# Altium PCB PCB.PcbDoc
Units mm, origin at the board's own origin, x right, y up, seen from the top; angles counter-clockwise.
Board outline 35.5 x 41.5 mm, 4 copper layers (Top Layer (PWR), Int1 (GND), Int2 (PWR), Bottom Layer (GND)), stack 1.439 mm thick; 6 components, 2 nets, 24 pads, 58 vias.
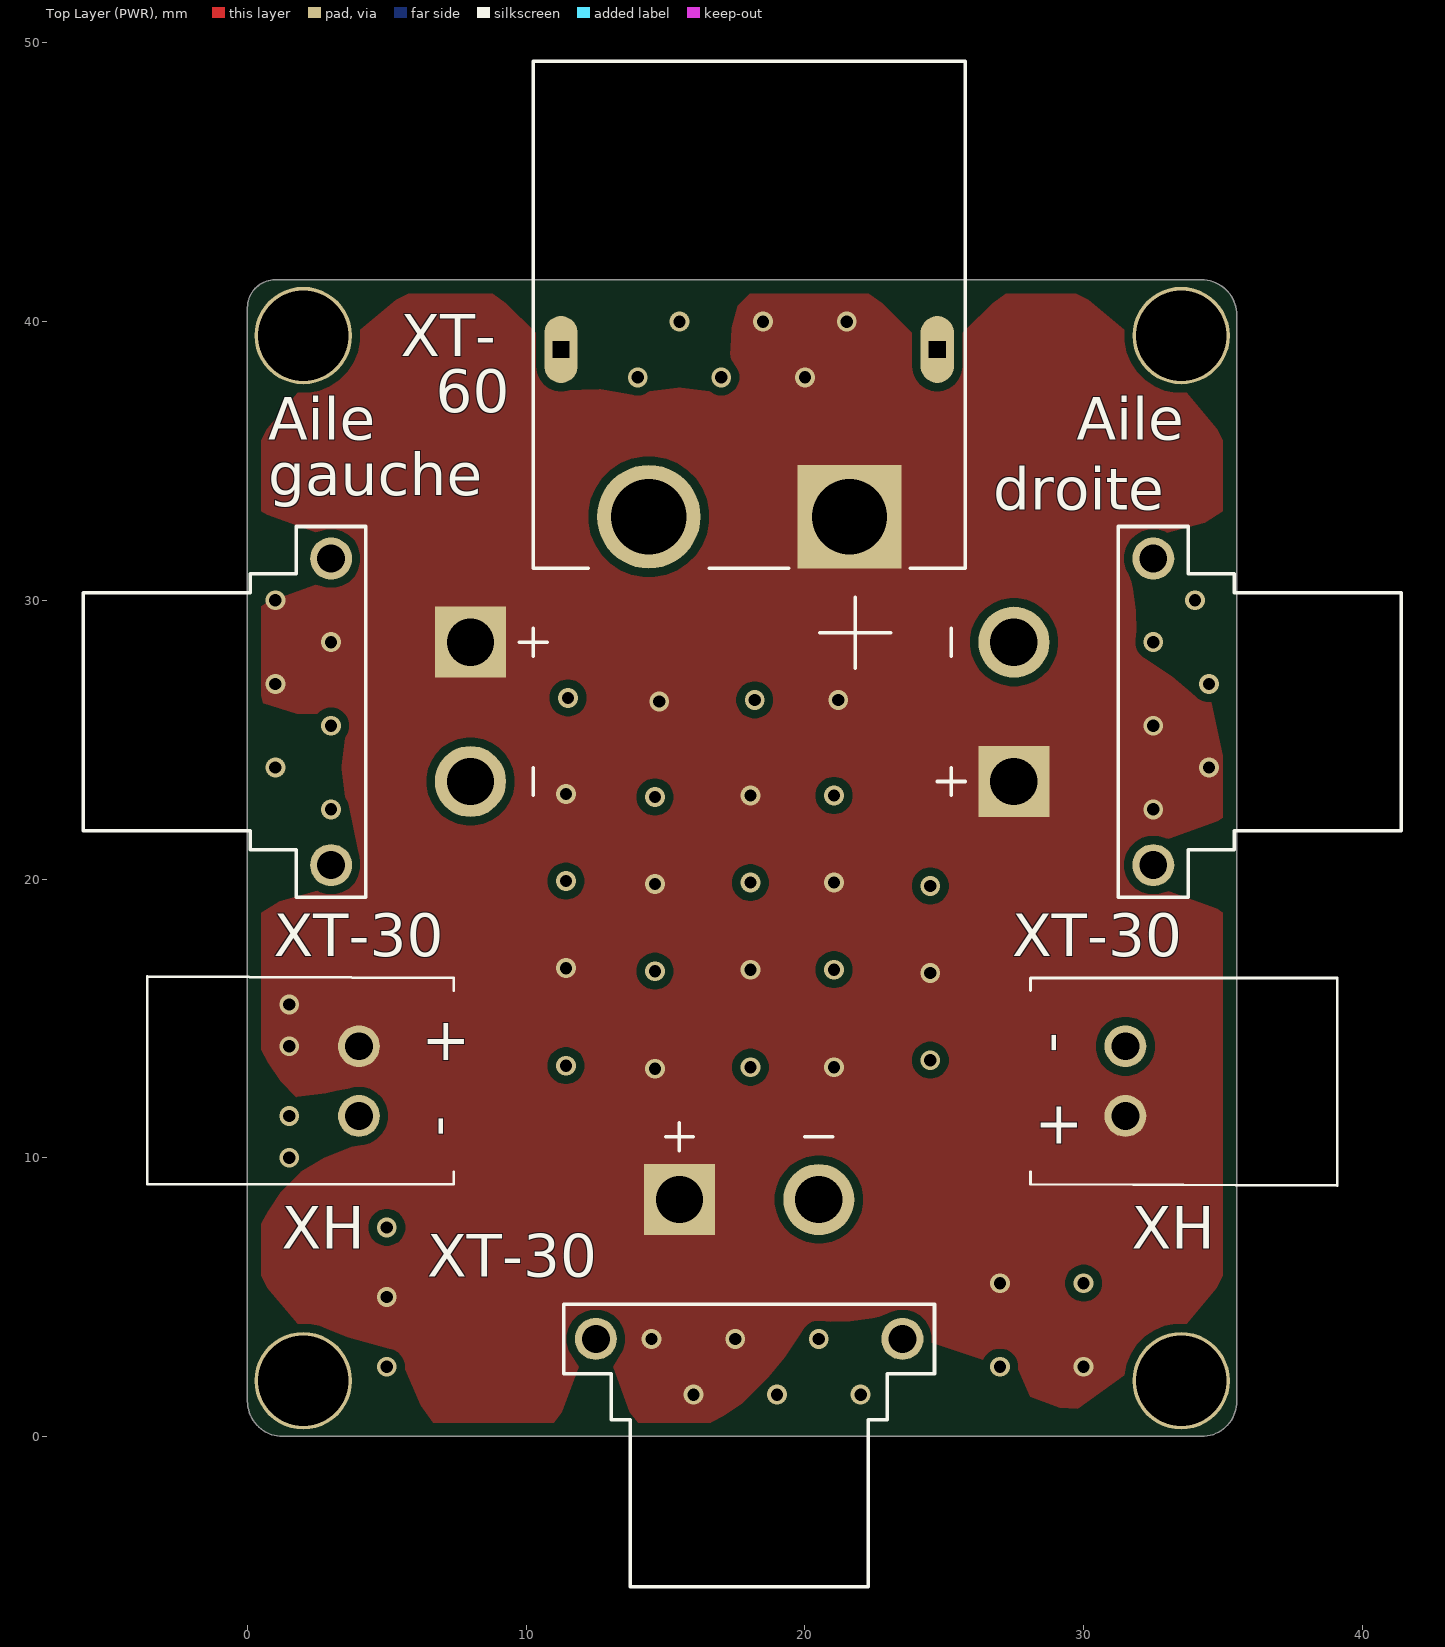
[diagram p0: Top Layer (PWR) view]
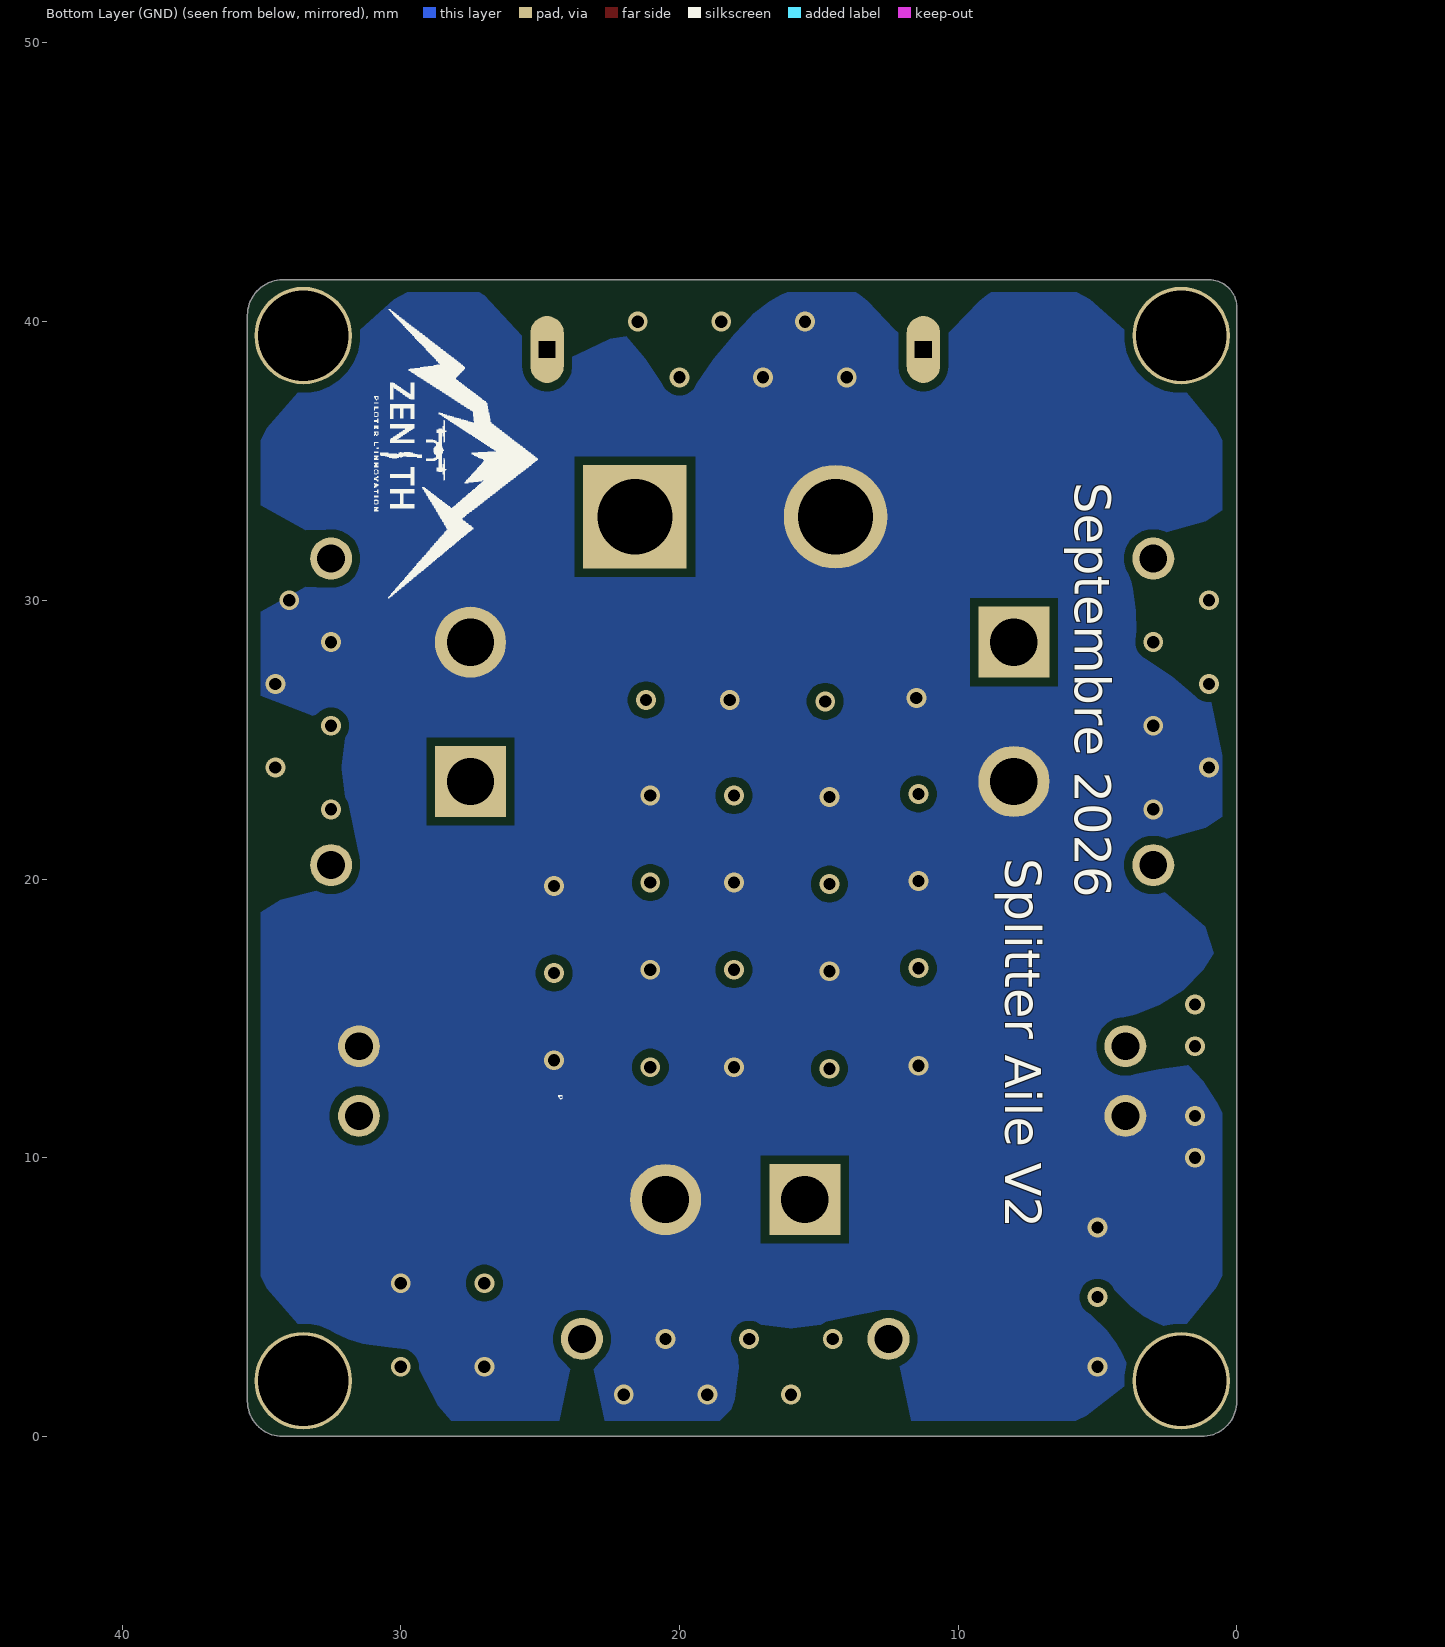
[diagram p1: Bottom Layer (GND) view, seen from below]
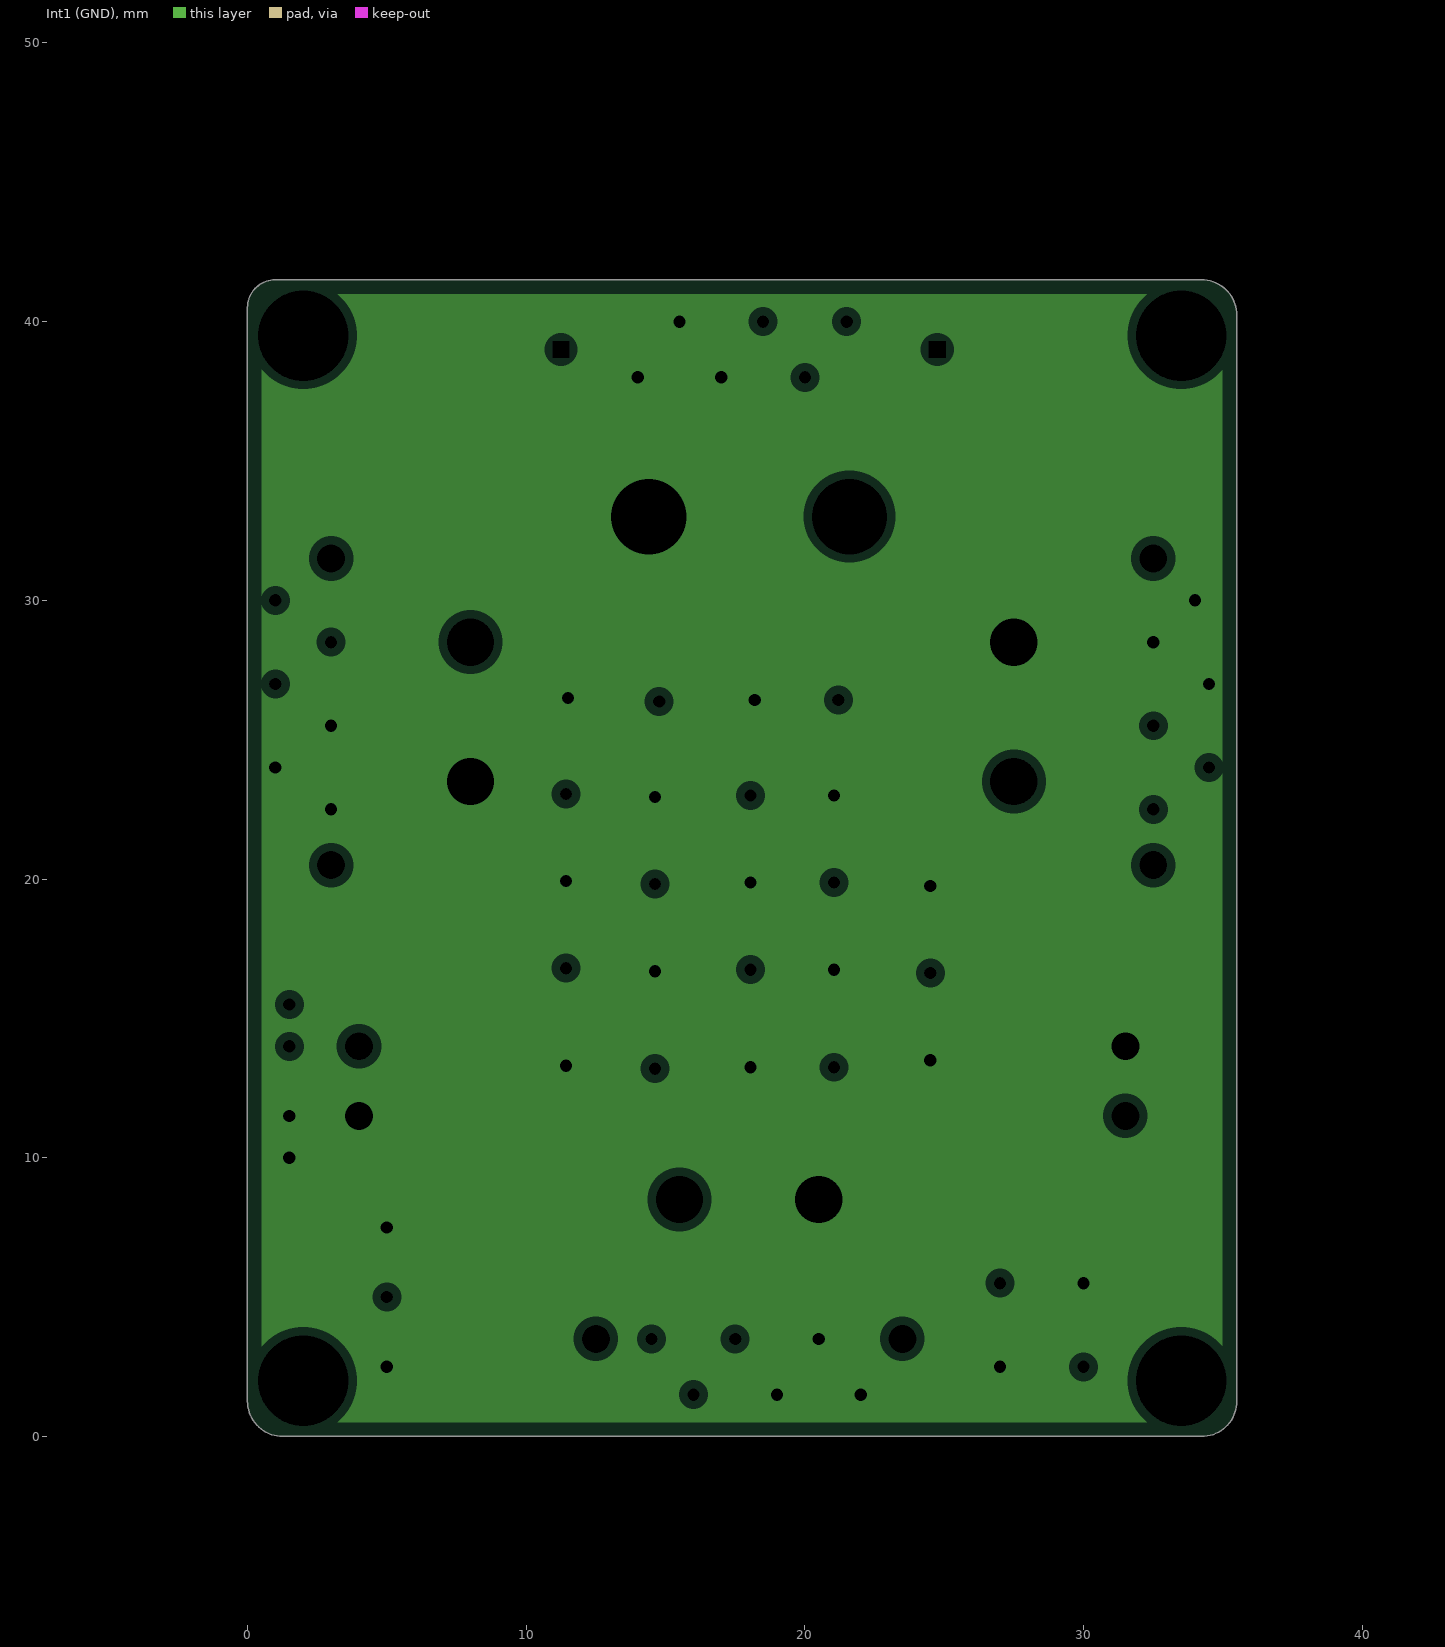
[diagram p2: Int1 (GND), clearances drawn from the general rule]
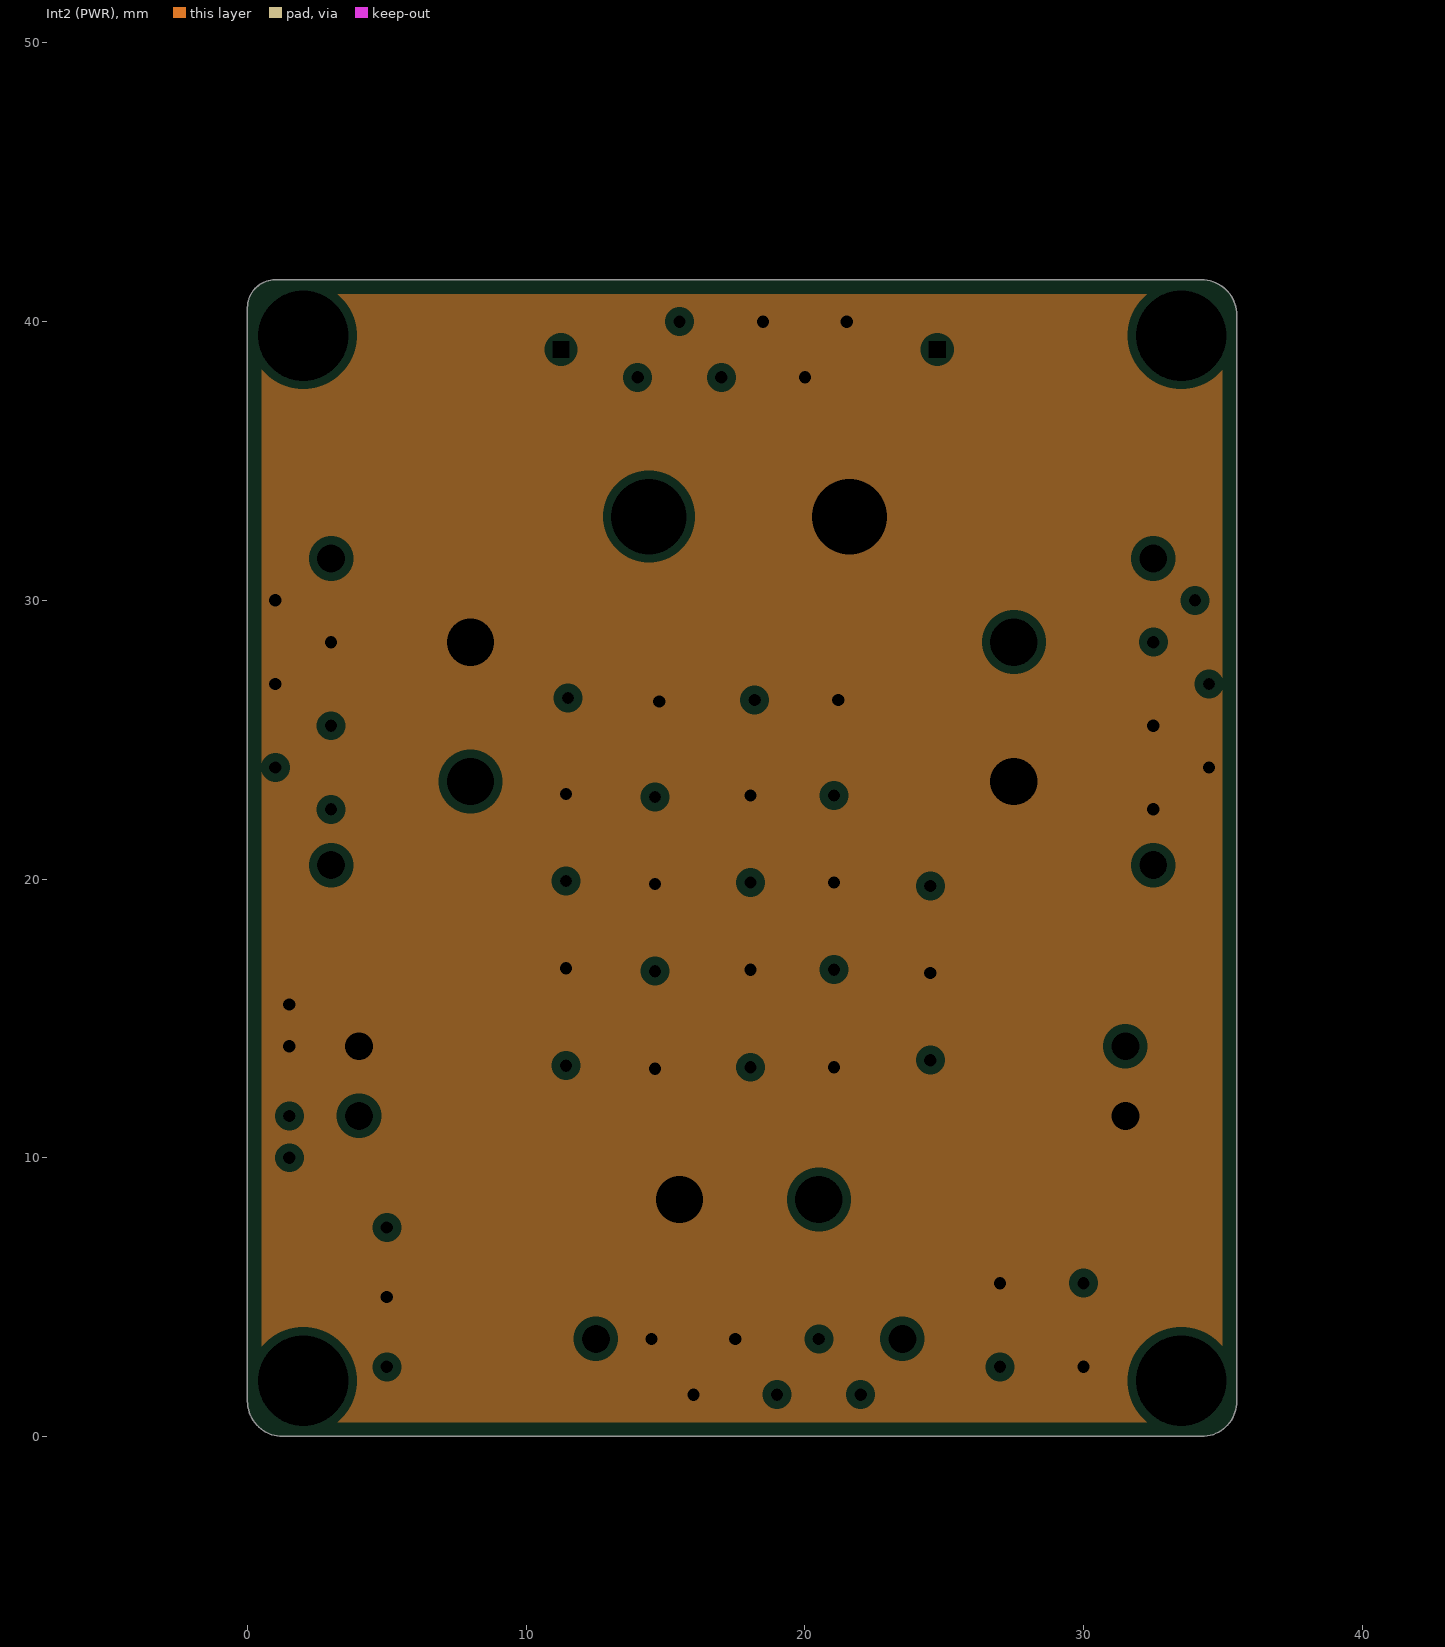
[diagram p3: Int2 (PWR), clearances drawn from the general rule]
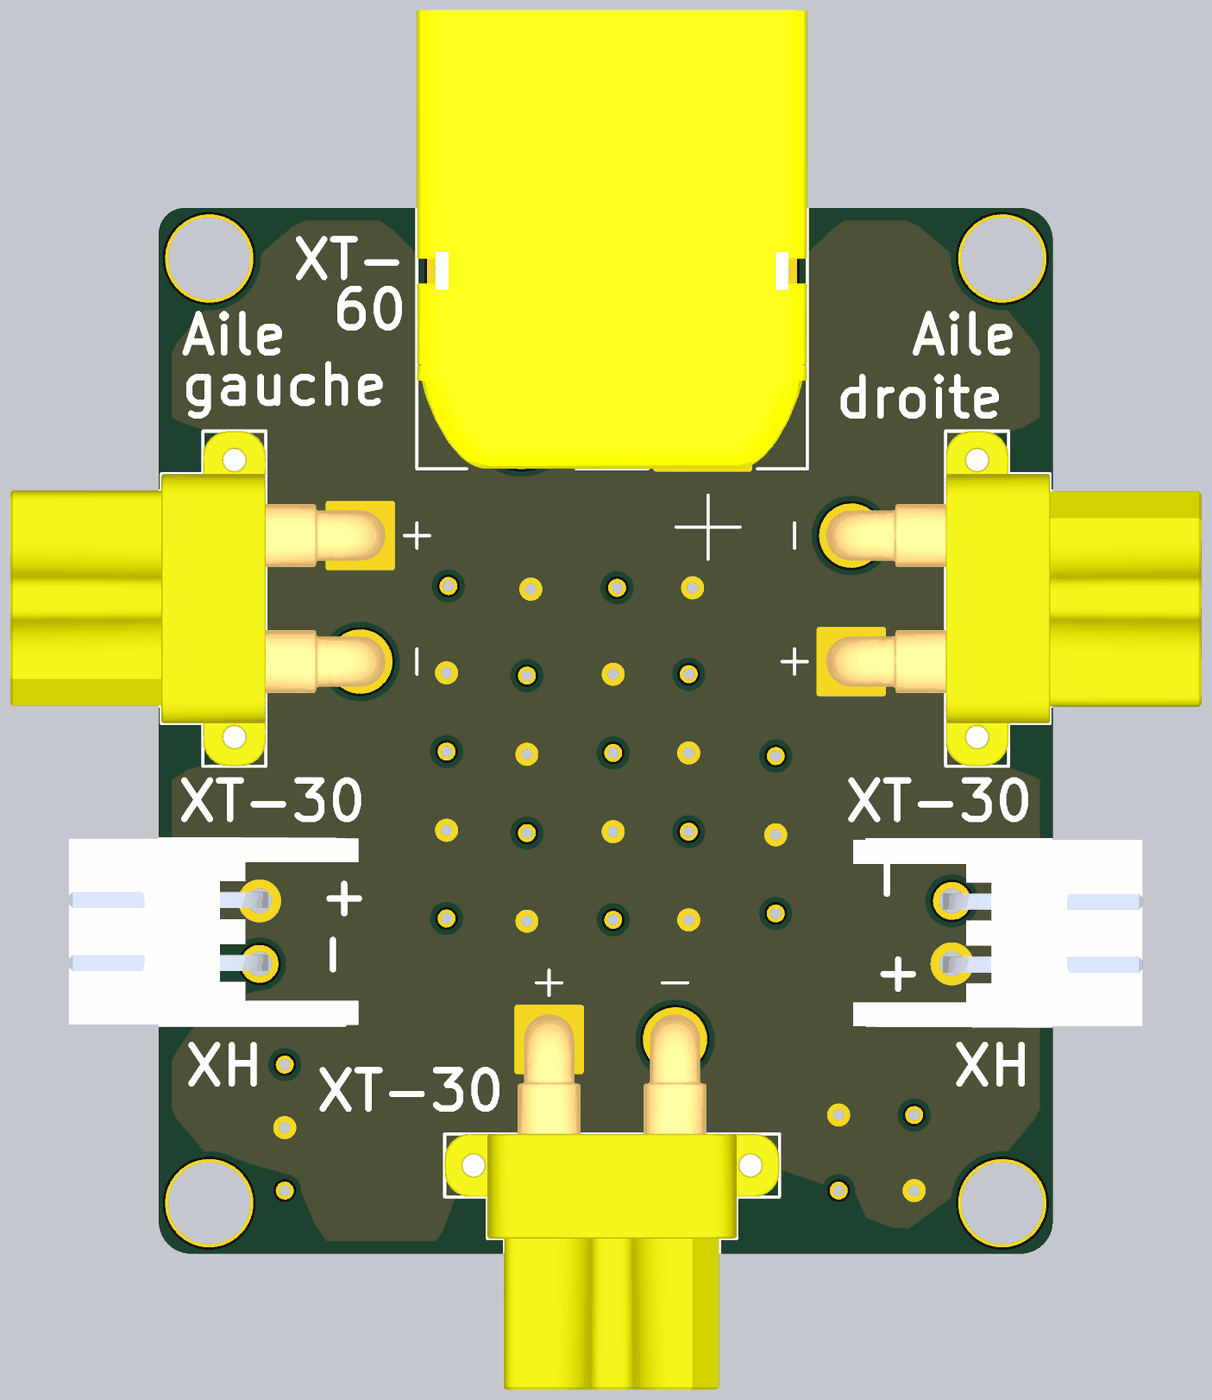
[diagram p4: 3D render of the assembled board from above, using the file's embedded part models]

## Layer stack, top to bottom
Top Solder: solder mask 0.0254, SM-001, Dk 4
Top Layer (PWR): signal copper 0.07
Dielectric 1: prepreg 0.1295, PP-017, Dk 4.3
Dielectric 2: prepreg 0.1295, PP-017, Dk 4.3
Int1 (GND): plane copper 0.035, net GND
Dielectric 3: core 0.7112, Core-039, Dk 4.8
Int2 (PWR): plane copper 0.035, net NetJ1_P
Dielectric 4: prepreg 0.1295, PP-017, Dk 4.3
Dielectric 5: prepreg 0.1295, PP-017, Dk 4.3
Bottom Layer (GND): signal copper 0.07
Bottom Solder: solder mask 0.0254, SM-001, Dk 4

## Board outline
0,1.27 0,40.5 cw(c1,40.5) 1,41.5 34.23,41.5 cw(c34.23,40.23) 35.5,40.23 35.5,1.27 cw(c34.23,1.27) 34.23,0 1.27,0 cw(c1.27,1.27)

## Design rules (kind name [scope] priority, off if disabled: settings)
Clearance [All] p1: gap=0.3 ignorepadtopadclearanceinfootprint=TRUE
PlaneClearance [All] p1: clearance=0.3
PlaneConnect [All] p1: planeconnectstyle=Direct reliefexpansion=0.508 reliefentries=4 reliefconductorwidth=0.254 reliefairgap=0.254
PolygonConnect [All] p1: connectstyle=Direct reliefconductorwidth=0.5 reliefentries=4 polygonreliefangle="90 Angle" airgapwidth=0.254
RoutingVias [All] p1: holewidth=0.711 width=1.27 viastyle="Through Hole" minholewidth=0.711 minwidth=1.27 maxholewidth=0.711 maxwidth=1.27
SolderMaskExpansion [All] p1: expansion=0.102 istentingtop=FALSE
SupplyNets "Schematic Supply Nets" [InNet('GND')] p1: voltage=0.000
Width [All] p1: maxlimit=8.5 minlimit=2 preferedwidth=3
28 further rules are at their usual default settings.

## Classes and differential pairs
component class Schem: JST-XH XH XT- XT-30

## Components (designator, comment, footprint, x,y, rotation, side; value= is the part's Value field where it differs from the comment)
XH "S2B-XH" S2BXHA1LFSN 4,11.5 r90 top (schematic designator "JST XH M")
XH "S2B-XH" S2BXHA1LFSN 31.5,14 r270 top (schematic designator "JST XH M")
XT- "XT60PW-M" AMASS_XT60PW-M 18,39 r0 top (schematic designator J3)
XT-30 "XT30PW-F" AMASS_XT30PW-F 3,26 r90 top (schematic designator J2)
XT-30 "XT30PW-F" AMASS_XT30PW-F 32.5,26 r270 top (schematic designator J2)
XT-30 "XT30PW-F" AMASS_XT30PW-F 18,3.5 r180 top (schematic designator J1)

## Footprints (in the part's own frame and the unit in brackets; to place one, negate y for a bottom-side part, rotate by r counter-clockwise, add the part's x,y. Pads: shape width x height; smd on the part's side, far side on the other; paste and mask are expansions set on the pad)
AMASS_XT30PW-F [mm]
  round 2.55 hole 1.7: N(-2.5,-5)
  rect 2.55x2.55 / inner round 2.55 / far side rect 2.55x2.55 hole 1.7: P(2.5,-5)
  round 1.508 hole 1: S1(5.5,0) S2(-5.5,0)
  silkscreen extent -6.65,-7.75 6.65,8.9, body extent -6.65,-6 6.65,8.9, height 5
AMASS_XT60PW-M [mm]
  rect 3.716x3.716 / inner round 3.716 / far side rect 3.716x3.716 hole 2.7: 1(3.6,-6)
  round 3.716 hole 2.7: 2(-3.6,-6)
  oval 1.2x2.4 hole 0.6 square: S1(6.75,0) S2(-6.75,0)
  silkscreen extent -7.75,-11.43 7.75,10.35, body extent -7.75,-7.85 7.75,10.35, height 8.4
S2BXHA1LFSN [mm]
  round 1.5 hole 1: 1(0,0) 2(2.5,0)
  silkscreen extent -2.45,-3.4 5,7.6, body extent -2.42,-3.93 4.98,7.57, height 6.15

## Part data
XH XH: library part S2B-XH-A-1_LF__SN_, "horizontal 2 pin", Manufacturer_Name="JST (JAPAN SOLDERLESS TERMINALS)", Manufacturer_Part_Number=S2B-XH-A-1(LF)(SN), Mouser Part Number=306-S2BXHA1LFSN, Datasheet Link=http://www.jst-mfg.com/product/pdf/eng/eXH.pdf, Height=6.1mm, Mouser Price/Stock=https://www.mouser.co.uk/ProductDetail/JST-Commercial/S2B-XH-A-1LFSN?qs=QpmGXVUTftHhNeC%252BPQWeTw%3D%3D
XT-: "Socket, DC supply, male, PIN: 2", Package=Package, Availability="Not in stock", Check_prices=https://www.snapeda.com/parts/XT60PW-M/AMASS/view-part/?ref=eda, MF=AMASS, MP=XT60PW-M, Price=None, SnapEDA_Link=https://www.snapeda.com/parts/XT60PW-M/AMASS/view-part/?ref=snap
XT-30 XT-30 XT-30: "Socket; DC supply; XT30; female; PIN: 2; on PCBs; THT; yellow; 15A", Package=None, Check_prices=https://www.snapeda.com/parts/XT30PW-F/AMASS/view-part/?ref=eda, MF=amass, MP=XT30PW-F, SnapEDA_Link=https://www.snapeda.com/parts/XT30PW-F/AMASS/view-part/?ref=snap

## Free pads (board coordinates)
  round 3.5 hole 3.25: 1(2,2) 1(2,39.5) 1(33.5,2) 1(33.5,39.5)

## Via types
v1: diameter 0.711, hole 0.44, Top Layer (PWR) to Bottom Layer (GND), 58 vias

## Nets (pads, with @x,y where several pads share a name; then routed paths per layer and width w, separated by ;. In a path a pad name is that pad's centre, name@x,y a point inside that pad or via, vN(x,y) a via of type N, cw(c..) or ccw(c..) an arc to the next point about the centre after c; other vN are vias at no path point)
GND: XH.1 XT-30.N XT-.2
  other v1: 19,1.5 22,1.5 5,2.5 27,2.5 20.5,3.5 30,5.5 5,7.5 1.5,10 1.5,11.5 18.045,13.247 11.426,13.303 24.5,13.5 14.619,16.694 21.045,16.747 24.5,19.75 18.045,19.872 11.426,19.928 3,22.5 14.619,22.944 21.045,22.997 1,24 3,25.5 18.198,26.427 11.5,26.5 34.5,27 32.5,28.5 34,30 14,38 17,38 15.5,40
NetJ1_P: XH.2 XT-30.P XT-.1
  other v1: 16,1.5 30,2.5 14.5,3.5 17.5,3.5 5,5 27,5.5 14.619,13.194 21.045,13.247 1.5,14 1.5,15.5 24.5,16.625 18.045,16.747 11.426,16.803 14.619,19.819 21.045,19.872 32.5,22.5 18.045,22.997 11.426,23.053 34.5,24 32.5,25.5 14.772,26.375 21.198,26.427 1,27 3,28.5 1,30 20,38 18.5,40 21.5,40
pads on no net: XT-30.S1 XT-30.S2 XT-.S1 XT-.S2

## Polygon pours and split planes (outlines as drawn)
GND on Bottom Layer (GND) "GND_L04_P000" (solid, pour order 0): 0.529,40.558 cw(c1.029,40.558) 1.029,41.058 34.529,41.058 cw(c34.529,40.558) 35.029,40.558 35.029,1.058 cw(c34.529,1.058) 34.529,0.558 1.029,0.558 cw(c1.029,1.058) 0.529,1.058
NetJ1_P on Top Layer (PWR) "NETJ1_P_L01_P021" (solid, pour order 21): 0.5,41 35,41 35,0.793 34.707,0.5 0.5,0.5 0.5,40.707 0.646,40.854
NetJ1_P on Int2 (PWR) (split plane): 34.349,40.982 34.465,40.955 34.576,40.909 34.678,40.846 34.769,40.769 34.846,40.678 34.909,40.576 34.955,40.465 34.982,40.349 34.991,40.243 34.99,40.23 34.99,1.27 34.991,1.257 34.982,1.151 34.955,1.035 34.909,0.924 34.846,0.822 34.769,0.731 34.678,0.654 34.576,0.591 34.465,0.545 34.349,0.518 34.243,0.509 34.23,0.51 1.27,0.51 1.257,0.509 1.151,0.518 1.035,0.545 0.924,0.591 0.822,0.654 0.731,0.731 0.654,0.822 0.591,0.924 0.545,1.035 0.518,1.151 0.509,1.257 0.51,1.27 0.51,40.5 0.509,40.512 0.518,40.596 0.546,40.688 0.591,40.773 0.652,40.848 0.727,40.909 0.812,40.954 0.904,40.982 0.988,40.991 1,40.99 34.23,40.99 34.243,40.991
GND on Int1 (GND) (split plane): 34.349,40.982 34.465,40.955 34.576,40.909 34.678,40.846 34.769,40.769 34.846,40.678 34.909,40.576 34.955,40.465 34.982,40.349 34.991,40.243 34.99,40.23 34.99,1.27 34.991,1.257 34.982,1.151 34.955,1.035 34.909,0.924 34.846,0.822 34.769,0.731 34.678,0.654 34.576,0.591 34.465,0.545 34.349,0.518 34.243,0.509 34.23,0.51 1.27,0.51 1.257,0.509 1.151,0.518 1.035,0.545 0.924,0.591 0.822,0.654 0.731,0.731 0.654,0.822 0.591,0.924 0.545,1.035 0.518,1.151 0.509,1.257 0.51,1.27 0.51,40.5 0.509,40.512 0.518,40.596 0.546,40.688 0.591,40.773 0.652,40.848 0.727,40.909 0.812,40.954 0.904,40.982 0.988,40.991 1,40.99 34.23,40.99 34.243,40.991

## Silkscreen, mask and mechanical layers (free items; w line width, h text height)
Top Overlay:
  text "60" at 6.754,36.754 h1.52
  text "Aile" at 0.754,35.754 h1.52
  text "Aile" at 29.754,35.754 h1.52
  text "gauche" at 0.754,33.762 h1.52
  text "droite" at 26.754,33.254 h1.52
  text "-" at 29.508,13.754 h1.52 r90
  text "+" at 6.254,13.5 h1.52
  text "-" at 7.508,10.754 h1.52 r90
  text "+" at 28.254,10.5 h1.52
Bottom Overlay:
  drawing of 28 lines, arcs and shapes, not listed
  text "Septembre 2026" at 5.813,34.246 h1.3 r90
  text "Splitter Aile V2" at 8.313,20.746 h1.3 r90
Mechanical 1:
  lines w0.254: 0,1.27 ccw(c1.27,1.27) 1.27,0 1.5,0 29,0 34.23,0 ccw(c34.23,1.27) 35.5,1.27 35.5,36.73 35.5,40.23 ccw(c34.23,40.23) 34.23,41.5 28,41.5 2.5,41.5 1,41.5 ccw(c1,40.5) 0,40.5 0,37 0,35.23 0,16.5 0,1.27